# Altium PCB PSU.PcbDoc
Units mm, origin at the board's own origin, x right, y up, seen from the top; angles counter-clockwise.
Board outline 68 x 28 mm, 2 copper layers (Top Layer, Bottom Layer); 10 components, 8 nets, 27 pads, 0 vias.
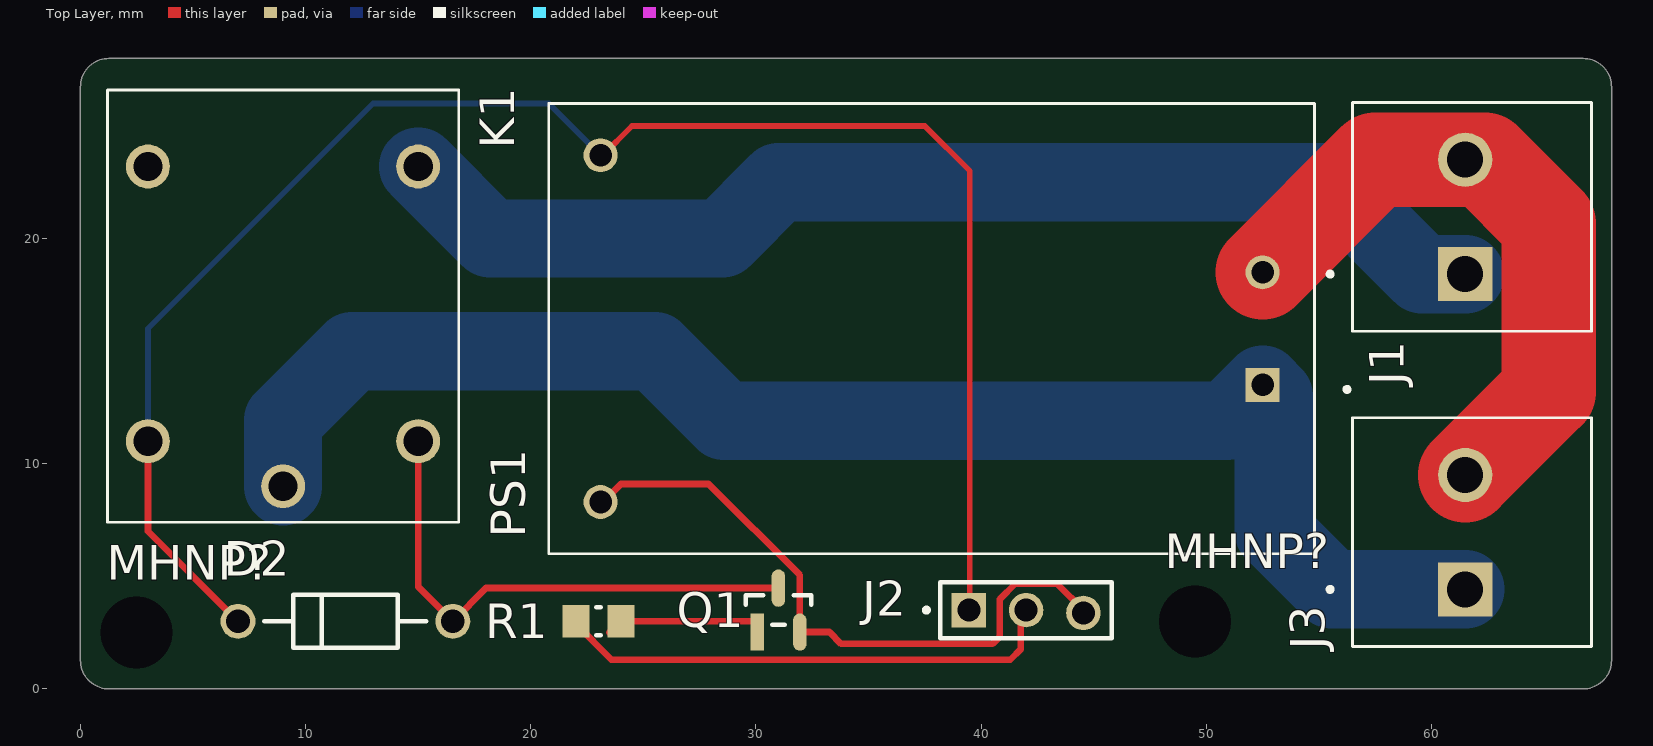
[diagram p0: Top Layer view]
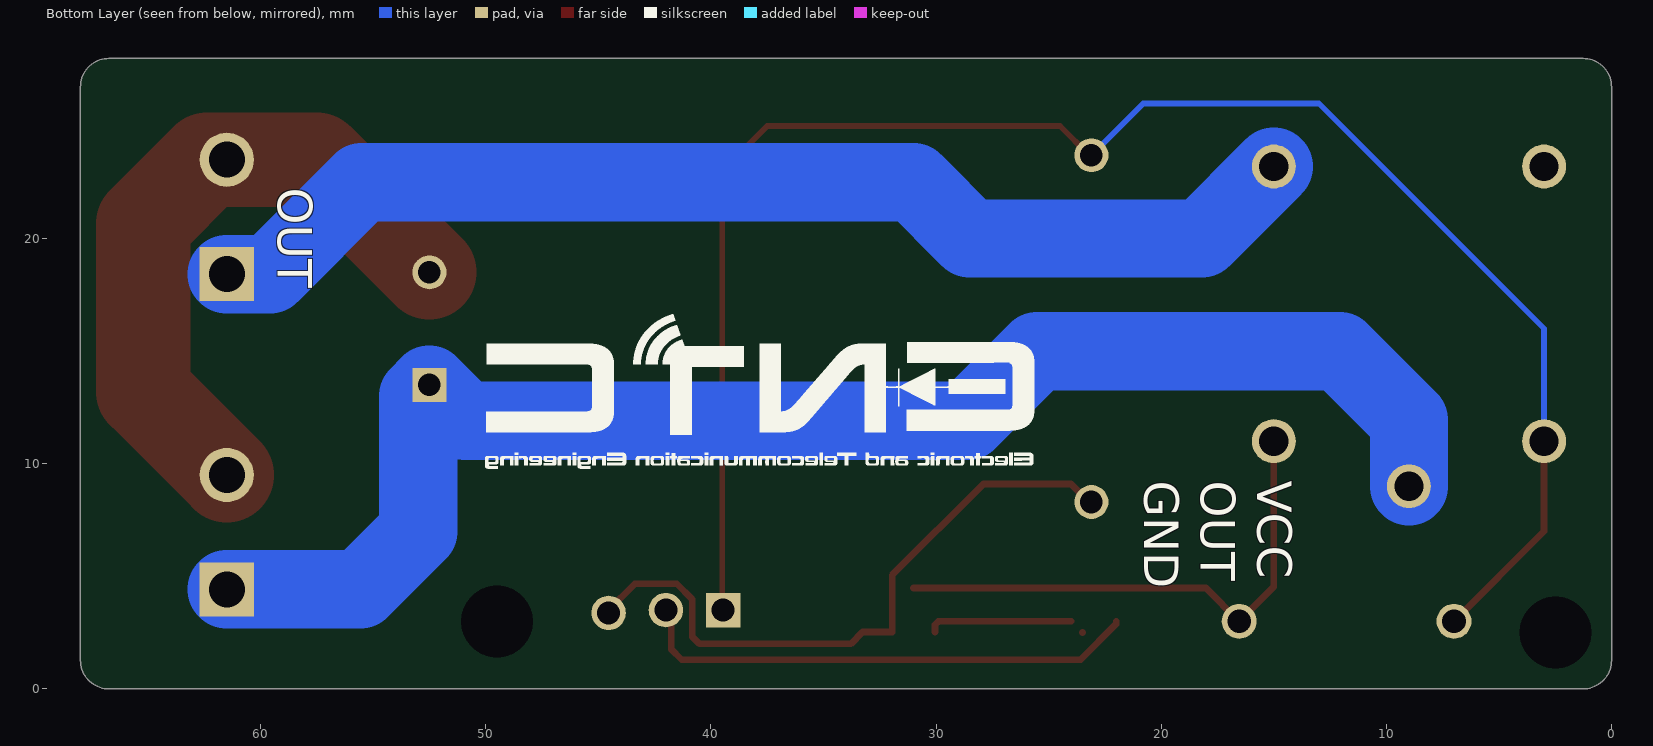
[diagram p1: Bottom Layer view, seen from below]
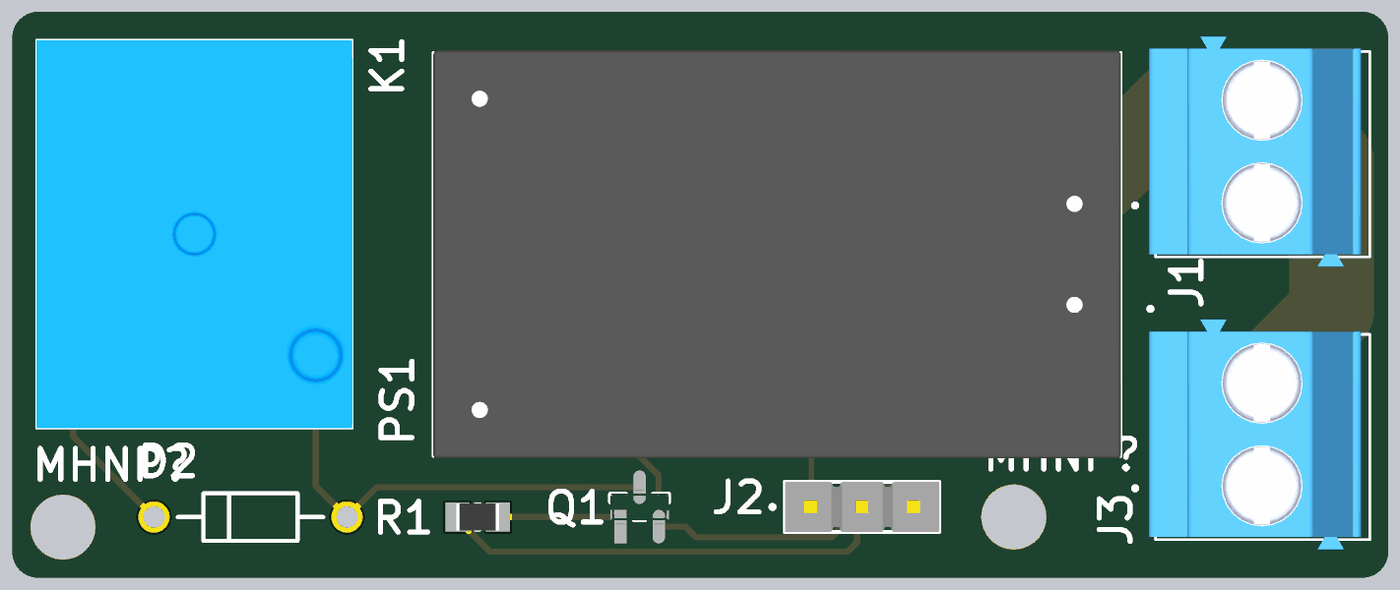
[diagram p2: 3D render of the assembled board from above, using the file's embedded part models]

## Layer stack, top to bottom
Top Solder: solder mask 0.0102, Solder Resist, Dk 3.5
Top Layer: signal copper 0.0356
Dielectric 1: dielectric 0.32, FR-4, Dk 4.8
Bottom Layer: signal copper 0.0356
Bottom Solder: solder mask 0.0102, Solder Resist, Dk 3.5

## Board outline
0,1.27 ccw(c1.27,1.27) 1.27,0 66.73,0 ccw(c66.73,1.27) 68,1.27 68,26.73 ccw(c66.73,26.73) 66.73,28 1.27,28 ccw(c1.27,26.73) 0,26.73

## Design rules (kind name [scope] priority, off if disabled: settings)
Clearance [All] p1: gap=0.254 ignorepadtopadclearanceinfootprint=FALSE
PolygonConnect [All] p1: connectstyle=Relief reliefconductorwidth=0.254 reliefentries=4 polygonreliefangle="90 Angle" airgapwidth=0.254
RoutingVias [All] p1: holewidth=0.711 width=1.27 viastyle="Through Hole" minholewidth=0.711 minwidth=1.27 maxholewidth=0.711 maxwidth=1.27
SolderMaskExpansion [All] p1: expansion=0.102 istentingtop=FALSE
SupplyNets "Schematic Supply Nets_2" [InNet('VCC')] p1: voltage=0.000
SupplyNets "Schematic Supply Nets" [InNet('GND')] p2: voltage=0.000
Width [All] p1: maxlimit=6.858 minlimit=0.254 preferedwidth=0.254
30 further rules are at their usual default settings.

## Classes and differential pairs
component class power_unit_pcb: 3 D2 J1 J2 K1 MHNP? PS1 Q1 R1

## Components (designator, comment, footprint, x,y, rotation, side; value= is the part's Value field where it differs from the comment)
D2 "1N4004" ONSC-AXIAL_LEAD-2-59-10_P 11.77,3 r0 top
J1 "TB009-508-02BE" CUI_TB009-508-02BE 61.5,18.42 r90 top
J2 "MTLW-103-XX-XX-S-XXX" SAMTEC_HTSW-103-XX-X-S 42,3.5 r180 top
J3 "TB009-508-02BE" CUI_TB009-508-02BE 61.5,4.42 r90 top
K1 "SRD-03VDC-SL-C" RELAY_SRD-03VDC-SL-C 9,17 r90 top
MHNP? "Mounting Hole Non plated 3.2mm" MTHNP3P2MM 49.5,3 r90 top
MHNP? "Mounting Hole Non plated 3.2mm" MTHNP3P2MM 2.5,2.5 r90 top
PS1 "HLK-PM01" CONV_HLK-PM01 37.8,16 r180 top
Q1 "BC817-40,215" FP-SOT23-IPC_A 31,3.5 r90 top
R1 "RC0805FR-071KL" RESC2013X60X35ML10T20 23,3 r0 top

## Footprints (in the part's own frame and the unit in brackets; to place one, negate y for a bottom-side part, rotate by r counter-clockwise, add the part's x,y. Pads: shape width x height; smd on the part's side, far side on the other; paste and mask are expansions set on the pad)
CONV_HLK-PM01 [mm]
  rect 1.508x1.508 / inner round 1.508 / far side rect 1.508x1.508 hole 1: 1(-14.7,2.5)
  round 1.508 hole 1: 2(-14.7,-2.5) 3(14.7,7.7) 4(14.7,-7.7)
  silkscreen extent -18.55,-10 17,10, body extent -17,-10.1 17,10.1, height 15
CUI_TB009-508-02BE [mm]
  rect 2.4x2.4 / inner round 2.4 / far side rect 2.4x2.4 hole 1.6: 1(0,0)
  round 2.4 hole 1.6: 2(5.08,0)
  silkscreen extent -2.54,-5.6 7.62,6.1, body extent -3.01,-5.17 8.35,5.33, height 18
FP-SOT23-IPC_A [mm]
  rect 1.655x0.602 smd paste+0 mask+0: 1(-0.975,0.95)
  rrect100% 1.655x0.602 smd paste+0 mask+0: 2(-0.975,-0.95) 3(0.975,0)
  silkscreen extent -0.65,-1.45 0.65,1.45, body extent -2.3,-1.95 2.3,1.95, height 0.25
MTHNP3P2MM [mm] "Mounting Hole Non plated 3.2mm"
  round 1 hole 3.2: ""(0,0)
ONSC-AXIAL_LEAD-2-59-10_P [mm] "AXIAL, 2-Leads, Diameter 2.35mm"
  round 1.55 hole 1.05: 1(-4.77,0) 2(4.77,0)
  silkscreen extent -3.59,-1.17 3.59,1.17
RELAY_SRD-03VDC-SL-C [mm]
  round 1.95 hole 1.3: COIL1(-6,6) COIL2(-6,-6) COM(-8,0) NC(6.2,6) NO(6.2,-6)
  silkscreen extent -9.6,-7.8 9.6,7.8, body extent -9.6,-7.8 9.6,7.8, height 15.8
RESC2013X60X35ML10T20 [mm] "Chip Resistor, 2-Leads, Body 2.1x1.35mm, IPC Low Density"
  rect 1.2x1.45 smd: 1(-1,0) 2(1,0)
  silkscreen extent -0.1,-0.63 0.1,0.63, body extent -1.05,-0.68 1.05,0.67, height 0.6
SAMTEC_HTSW-103-XX-X-S [mm]
  rect 1.53x1.53 / inner round 1.53 / far side rect 1.53x1.53 hole 1.02: 01(2.54,0)
  round 1.53 hole 1.02: 02(0,0) 03(-2.54,0.127)
  silkscreen extent -3.81,-1.24 4.53,1.24, body extent -3.81,-1.24 3.81,1.24, height 8.38

## Part data
D2: library part CMP-0902-00115-1, "Standard Recovery Rectifier, 2-Pin Axial_Lead, Pb-Free, Bulk Bag", Manufacturer="On Semiconductor", ComponentLink1Description="Manufacturer URL", ComponentLink1URL=http://www.onsemi.com/, ComponentLink2Description=Datasheet, ComponentLink2URL=http://www.onsemi.com/pub_link/Collateral/1N4001-D.PDF, ComponentLink3Description="Package Specification", ComponentLink3URL=http://www.onsemi.cn/pub_link/Collateral/59-10.PDF, DatasheetVersion="Rev. 13", IFSM Max (A)=30, IO(rec) Max (A)=1, Mounting Technology="Through Hole", PackageDescription="2-Pin, Axial Lead, Diameter 2.35 mm", PackageReference=AXIAL_LEAD-2-59-10, PackageVersion="Rev. U, 02/2005", Packing="Bulk Bag", PartNumber=1N4004, RoHS=TRUE, Type="Standard Recovery", VRRM Max (V)=400
J1 J3: library part CMP-002-00071-1, "2~24 Poles, Screw Type, Horizontal, 5.08 Pitch, 26~12 (AWG), Terminal Block Connector", Case/Package=None, Check_prices=https://www.snapeda.com/parts/TB009-508-02BE/Same+Sky/view-part/?ref=eda, Component Type=Standard, Design Item ID=TB009-508-02BE, MF="Same Sky", MP=TB009-508-02BE, Pins=2, SnapEDA_Link=https://www.snapeda.com/parts/TB009-508-02BE/Same+Sky/view-part/?ref=snap, Source=TB009-508-02BE.SchLib
J2: "Connector Header Through Hole 40 position 0.100\" (2.54mm)", Package=None, Availability=Unavailable, MP=MTLW-103-XX-XX-S-XXX, Price=None
K1: library part CMP-003-000000-1, "Relays General Purpose Non Latching 3VDC SPDT 10A (250VAC) Max 5PIN", Package="NON STANDARD-5 Songle Relay", Check_prices=https://www.snapeda.com/parts/SRD-03VDC-SL-C/Songle+Relay/view-part/?ref=eda, Component Type=Standard, Design Item ID=SRD-03VDC-SL-C, MF="Songle Relay", MP=SRD-03VDC-SL-C, Pin Count=5, SnapEDA_Link=https://www.snapeda.com/parts/SRD-03VDC-SL-C/Songle+Relay/view-part/?ref=snap, Source=SRD-03VDC-SL-C.SchLib
MHNP? MHNP?: library part MTHNP3P2MM
PS1: "The HLK-PM01 is a small size low cost AC to DC converter which can take in 110V/220V AC at 50/60 Hz and give 5V 3W output. The module is can be used in designs which run on 5V and needs to be powered form the AC mains.", LCSC Part Number=C209903, Package=None, Check_prices=https://www.snapeda.com/parts/hlk-pm01/Hi-link/view-part/?ref=eda, Component Type=Standard, Design Item ID=HLK-PM01, MF=Hi-link, MP=hlk-pm01, Pin Count=4, SnapEDA_Link=https://www.snapeda.com/parts/hlk-pm01/Hi-link/view-part/?ref=snap, Source=HLK-PM01.SchLib
Q1: "TRANS NPN 45V 0.5A SOT23", Ambient Temperature Range High=+150°C, Ambient Temperature Range Low=-65°C, Collector Base Voltage=50V, Collector Emitter Breakdown Voltage=45V, Collector Emitter Saturation Voltage=700mV, Emitter Base Voltage=5V, LCSC Part Number=C52801, Manufacturer=Nexperia, Max Collector Current=500mA, Package=SOT23, Power Dissipation=250mW, Temperature="to +150°C", Unity Gain Freq=100MHz, Automotive=Yes, Automotive Grade="Grade 0", Category=Trans, Collector Emitter Voltage=45V, ComponentLink2Description=Datasheet, ComponentLink2URL=https://assets.nexperia.com/documents/data-sheet/BC817_SER.pdf, Device Class L1="Discrete Semiconductors", Device Class L2=Transistors, Device Class L3=BJTs, Digikey Description="TRANS NPN 45V 0.5A SOT23", Footprint Url=https://assets.nexperia.com/documents/outline-drawing/SOT23.pdf, Height=1.1mm, Hfe Max=600, Hfe Min=250, Hfe Testic=100mA, Hfe Testvce=1V, Ipc Land Pattern Name=SOT95P230X100-3, Lead Free=Yes, Manufacturer Part Number=BC817-40,215, Max Junction Temp=+150°C, Mouser Description="BC817 Series 45 V 500 mA 250 mW SMT NPN General-Purpose Transistor - SOT-23-", Number Of Elements=1, Number Of Npn=1, Octopart=https://octopart.com/bc817-40%2C215-nexperia-78739081, RoHS=TRUE, Rthja Max=500K/W, Temperature Range High=+150°C
R1: library part CMP-2100-03671-1, "Chip Resistor, 1 KOhm, +/- 1%, 125 mW, -55 to 155 degC, 0805 (2012 Metric), RoHS, Tape and Reel", Case Code (Imperial)=0805, Case Code (Metric)=2012, Manufacturer=Yageo, Max Operating Temperature=155degC, Max Power Dissipation=125mW, Min Operating Temperature=-55degC, Package Description="2-Pin Surface Mounted Device, Body 2 x 1.25 mm", Package Quantity=1, Resistance=1KOhm, Temperature Coefficient=100ppm/degreesC, Tolerance=1%, Voltage Rating=150V, Case/Package=0805, Composition=ThickFilm, Datasheet URL=http://www.yageo.com/NewPortal/yageodocoutput?fileName=/pdf/R-Chip/PYu-RC_Group_51_RoHS_L_5.pdf, Datasheet Version="Rev. 5, 10/2016", Depth=1.25mm, Height=0.024inch, Lead Free=LeadFree, Length=0.079inch, Manufacturer URL=http://www.yageo.com/, Military Standard=Not, Number of Pins=2, Number of Terminations=2, Package Reference=0805, Packaging=TapeandReel, Power Rating=125mW, REACH SVHC=Unknown, RoHSCompliant=true, Termination=SMD/SMT, Voltage Rating (DC)=150V, Width=0.049inch

## Free pads (board coordinates)
  round 3.2 on Mech1: 6(2.5,2.5) 8(49.5,3)

## Nets (pads, with @x,y where several pads share a name; then routed paths per layer and width w, separated by ;. In a path a pad name is that pad's centre, name@x,y a point inside that pad or via, vN(x,y) a via of type N, cw(c..) or ccw(c..) an arc to the next point about the centre after c; other vN are vias at no path point)
GND: J2.03 PS1.3 Q1.2 | length 28.7
  Top Layer w0.3: PS1.3 23.203,8.3 24.003,9.1 27.899,9.1 31.95,5.049 Q1.2 33.26,2.525 33.785,2 40.5,2 40.831,2.331 40.831,3.984 41.516,4.669 43.371,4.669 J2.03@44.54,3.5
NetD2_2: D2.2 K1.COIL2 Q1.3 | length 23.7
  Top Layer w0.3: K1.COIL2 15,4.54 D2.2 18.015,4.475 Q1.3
NetJ1_1: J1.1 K1.NO | length 50.6
  Bottom Layer w3.48: K1.NO 18.2,20 28.5,20 31,22.5 55.5,22.5 59.58,18.42 J1.1
NetJ1_2: J1.2 J3.2 PS1.2 | length 28.6
  Top Layer w4.2: PS1.2 57.5,23.5 J1.2 62.361,23.5 65.204,20.657 65.204,13.204 J3.2
NetJ2_02: J2.02 R1.1 | length 22.6
  Top Layer w0.3: R1.1 22,2.875 23.582,1.293 41.293,1.293 41.765,1.765 41.765,3.265 J2.02
NetJ3_1: J3.1 K1.COM PS1.1 | length 65.9
  Bottom Layer w3.48: K1.COM 9,11.93 12.07,15 25.5,15 28.588,11.912 50.912,11.912 PS1.1 53,13 53,7 55.58,4.42 J3.1
NetQ1_1: Q1.1 R1.2 | length 6.4
  Top Layer w0.3: R1.2 29.899,3 30.05,2.849 Q1.1
VCC: D2.1 J2.01 K1.COIL1 PS1.4 | length 77.1
  Top Layer w0.254: PS1.4 23.2,23.7 24.5,25 37.5,25 39.5,23 39.5,3.54 J2.01
  Top Layer w0.3: K1.COIL1 3,7 D2.1
  Bottom Layer w0.254: K1.COIL1 3,16 13,26 20.8,26 PS1.4
pads on no net: K1.NC MHNP?.

## Silkscreen, mask and mechanical layers (free items; w line width, h text height)
Top Overlay:
Bottom Overlay:
  drawing of 52 lines, arcs and shapes, not listed
  text "OUT" at 59.246,22.246 h1.52 r90
  text "VCC" at 15.746,9.246 h1.52 r90
  text "OUT" at 18.246,9.246 h1.52 r90
  text "GND" at 20.746,9.246 h1.52 r90
Mechanical 1:
  lines w0.254: 7,3 cw(c6.5,3) 6.5,2.5 ; 6.5,2.5 6.5,2.5 ; 0,1.27 ccw(c1.27,1.27) 1.27,0 8,0 54.73,0 66.73,0 ccw(c66.73,1.27) 68,1.27 68,26.73 ccw(c66.73,26.73) 66.73,28 54.73,28 1.27,28 ccw(c1.27,26.73) 0,26.73 0,1.27
Bottom Component Center:
  text "IN" at 59.246,8.246 h1.52 r90